# Altium PCB PCB2.PcbDoc
Units mm, origin at the board's own origin, x right, y up, seen from the top; angles counter-clockwise.
Board outline 83.57 x 47.5 mm, 2 copper layers (Top Layer, Bottom Layer); 9 components, 61 nets, 39 pads, 0 vias.
Unrouted connection lines stored in the file: 17.
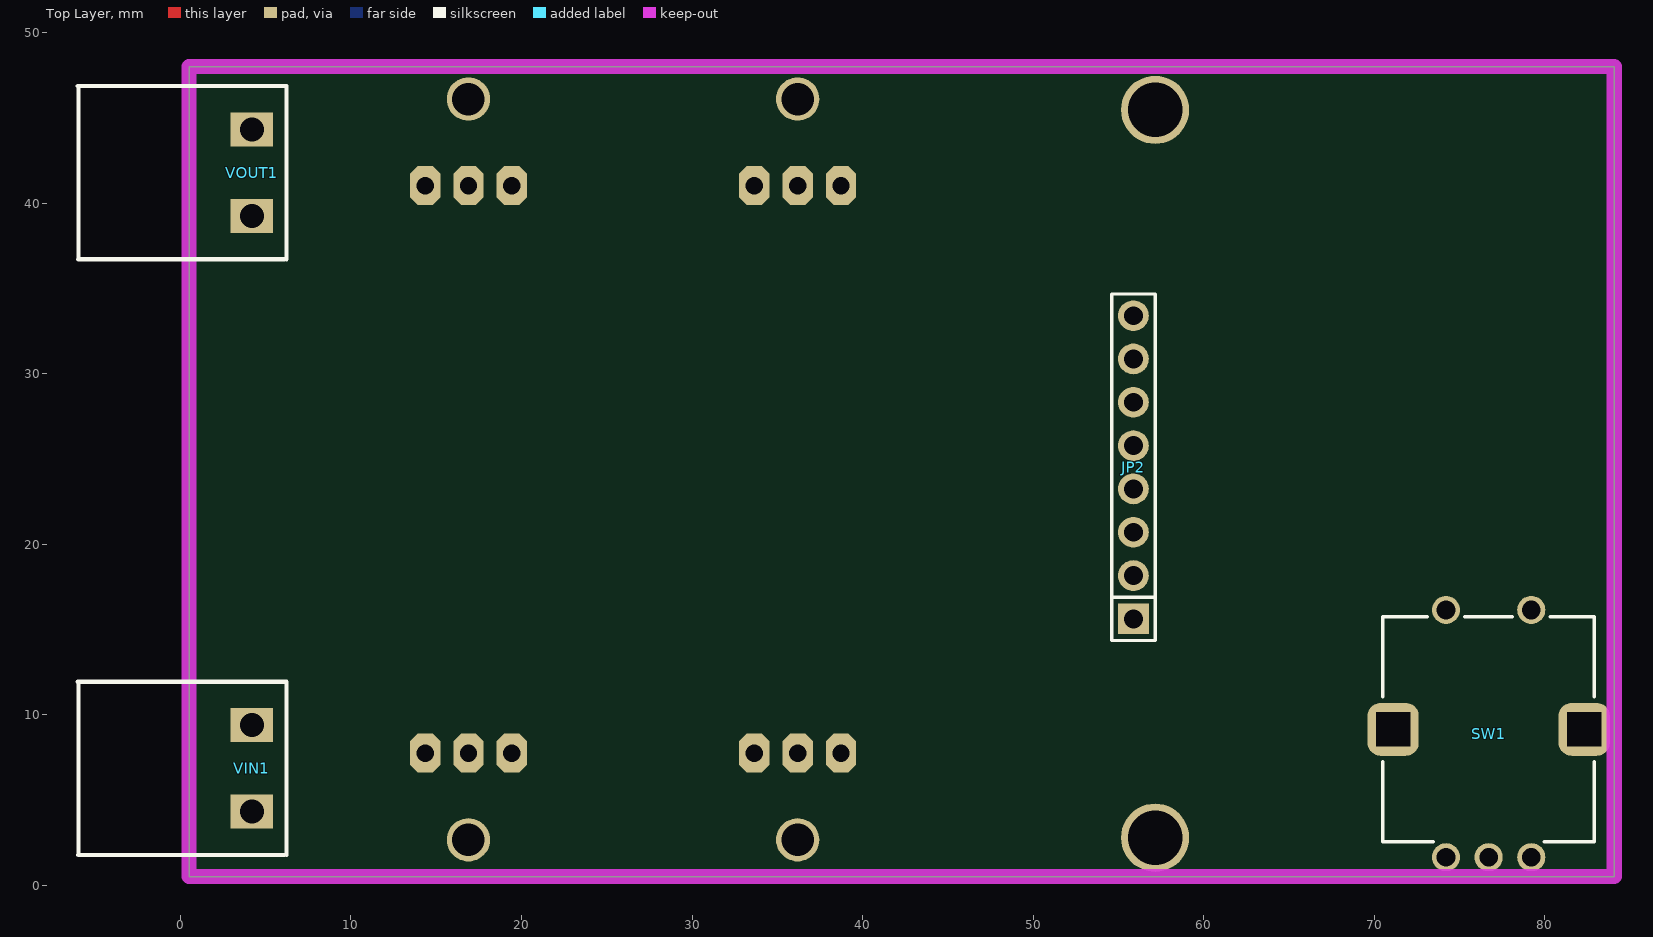
[diagram p0: Top Layer view]
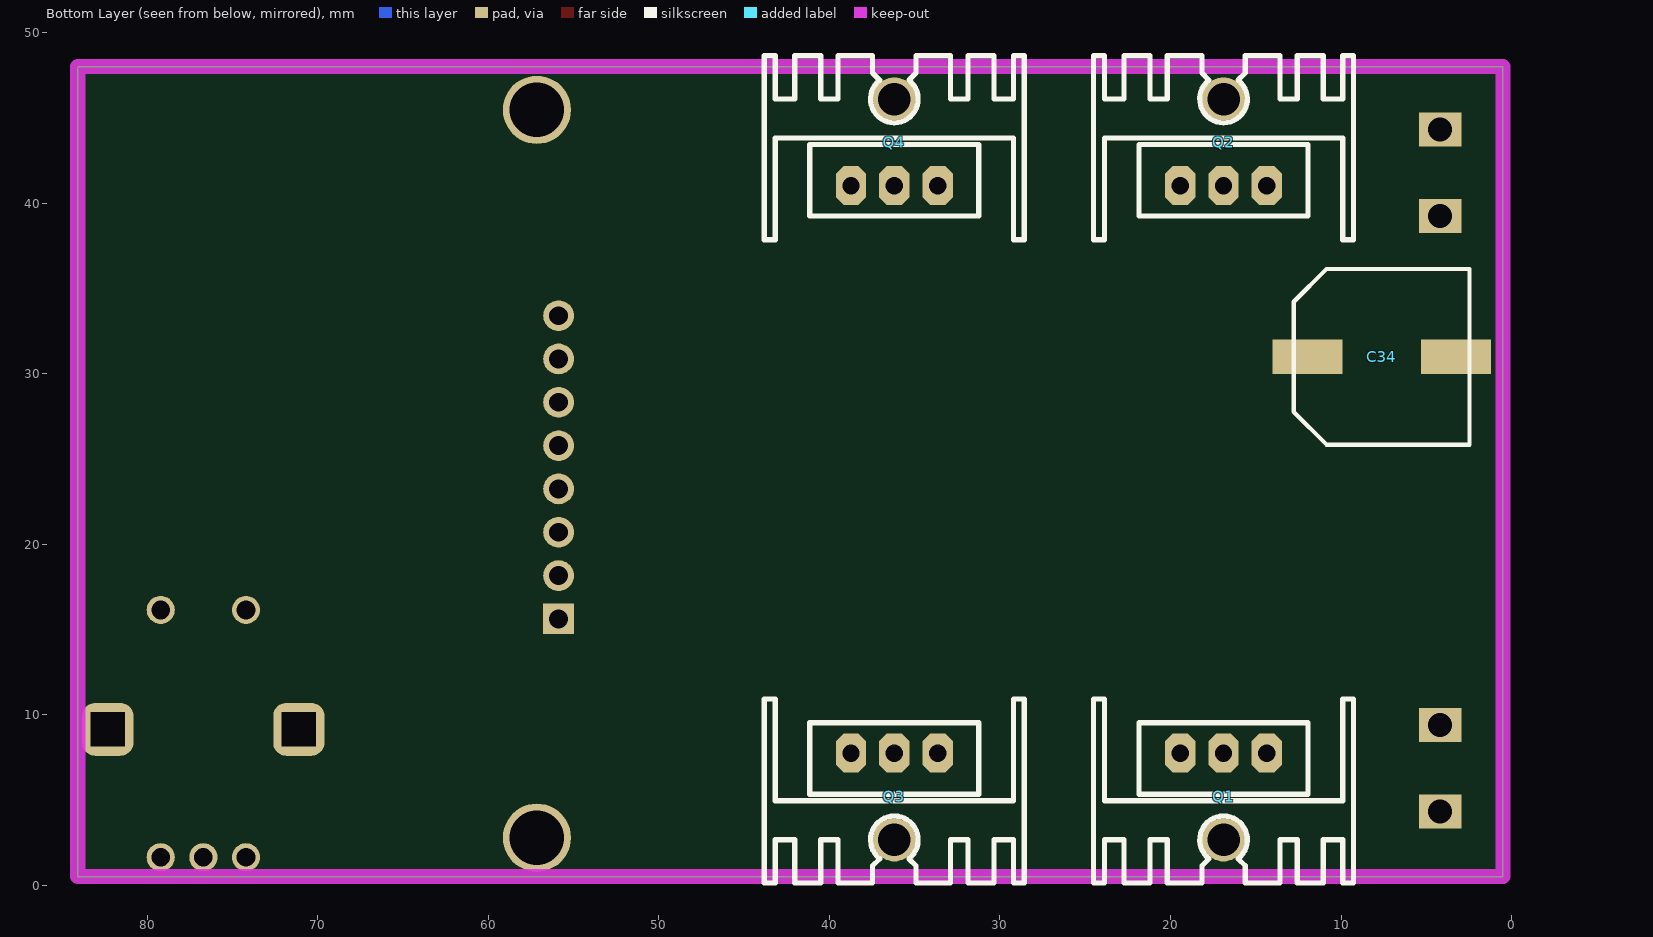
[diagram p1: Bottom Layer view, seen from below]

## Layer stack, top to bottom
Top Solder: solder mask 0.0102, Solder Resist, Dk 3.5
Top Layer: signal copper 0.0356
Dielectric 1: dielectric 0.32, FR-4, Dk 4.8
Bottom Layer: signal copper 0.0356
Bottom Solder: solder mask 0.0102, Solder Resist, Dk 3.5

## Board outline
0.508,0.508 0.508,48.006 84.074,48.006 84.074,0.508

## Design rules (kind name [scope] priority, off if disabled: settings)
Clearance [All] p1: gap=0.203 ignorepadtopadclearanceinfootprint=FALSE
PlaneConnect [All] p1: planeconnectstyle=Direct reliefexpansion=0.508 reliefentries=4 reliefconductorwidth=0.254 reliefairgap=0.254
PolygonConnect [All] p1: connectstyle=Direct reliefconductorwidth=0.254 reliefentries=4 polygonreliefangle="90 Angle" airgapwidth=0.254
RoomDefinition Sheet2 [InComponentClass('Sheet2')] p1: confinementstyle=ConfineIn formatcopy=TRUE lockcomponents=FALSE outline -57.785,-160.655 -6.985,-160.655 -6.985,-135.255 -57.785,-135.255
RoutingVias [All] p1: holewidth=0.4 width=0.8 viastyle="Through Hole" minholewidth=0.4 minwidth=0.8 maxholewidth=0.4 maxwidth=0.8
SolderMaskExpansion [All] p1: expansion=0.102 istentingtop=FALSE
Width [All] p1: maxlimit=1.524 minlimit=0.229 preferedwidth=0.635
29 further rules are at their usual default settings.

## Components (designator, comment, footprint, x,y, rotation, side; value= is the part's Value field where it differs from the comment)
C34 "1000uF" "tu nhom 10 (G)" 7.62,30.988 r180 bottom
JP2 "lcd_1.8 inch" "JP 1x8 DT" 55.88,15.621 r90 top
Q1 "IRFZ44" QTO-220H3 14.351,7.747 r0 bottom locked
Q2 "IRFZ44" QTO-220H3 19.431,41.021 r180 bottom
Q3 "IRFZ44" QTO-220H3 33.655,7.747 r0 bottom locked
Q4 "IRFZ44" QTO-220H3 38.735,41.021 r180 bottom
SW1 "482024764004" 482024764004 76.708,9.144 r270 top locked
VIN1 "CON 2 EDG5.08" "CON 2 2EDG5.08" 4.191,4.318 r90 top
VOUT1 "CON 2 EDG5.08" "CON 2 2EDG5.08" 4.191,39.243 r90 top

## Footprints (in the part's own frame and the unit in brackets; to place one, negate y for a bottom-side part, rotate by r counter-clockwise, add the part's x,y. Pads: shape width x height; smd on the part's side, far side on the other; paste and mask are expansions set on the pad)
482024764004 [mm]
  round 1.65 hole 1.1: 1(-7,-2.5) 2(-7,2.5) A(7.5,-2.5) B(7.5,2.5) C(7.5,0)
  rrect50% 3.1x3 hole 2 square: S1(0,5.6) S2(0,-5.6)
  silkscreen extent -6.6,-6.2 6.6,6.2, body extent -7.32,-6.81 7.8,6.81, height 20.1
"CON 2 2EDG5.08" [mm]
  rect 2x2.5 hole 1.4: 1(0,0) 2(5.08,0)
  silkscreen extent -2.54,-2.03 7.62,10.21, body extent -2.5,-1.75 7.58,10.25, height 3.15
"JP 1x8 DT" [mm] "8 pins, 1 row, straight, gold plating"
  rect 1.8x1.8 hole 1.1: 1(0,0)
  round 1.8 hole 1.1: 2(2.54,0) 3(5.08,0) 4(7.62,0) 5(10.16,0) 6(12.7,0) 7(15.24,0) 8(17.78,0)
  silkscreen extent -1.27,-1.27 19.05,1.27, body extent -1.27,-1.27 19.05,1.27, height 8.54
QTO-220H3 [mil] "TO-220 1-2-3"
  oct 70x90 hole 40: 1(0,0) 2(100,0) 3(200,0)
  round 100 hole 75: 2(100,200)
  silkscreen extent -200,-125 400,300, body extent -190,-102 392,323, height 984
"tu nhom 10 (G)" [mm]
  rect 4.1x2 smd: 1(-4.35,0) 2(4.35,0)
  silkscreen extent -5.15,-5.15 5.15,5.15, body extent -5.9,-5.25 5.9,5.25, height 10.5

## Part data
C34: library part "Tu Nhom 1000uF 10V", "Dán", Chung_Loai=Dán, Don_Vi=Con, Ma_Hang=MH007515, So_Chan=2, Ten_Linh_Kien="Tụ Nhôm 1000uF 10V"
JP2: library part "JP 1x8 2.54 Duc Thang", "Cắm", Chung_Loai=Cắm, Don_Vi=Con, Ma_Hang=MH000903, Ten_Linh_Kien="Jump Đơn Đực 2.54MM 1x40P Thẳng 11MM"
Q1 Q2 Q3 Q4: "HEXFET N-Channel Power MOSFET"
SW1: "WS-ENTV Mechanical Incremental Encoder Switch, Plastic Shaft without bushing, 24Pulse/360°, 24positi", Insulation Resistance=100MΩ, Manufacturer="Wurth Elektronik", Operating Temperature Max=85°C, Operating Temperature Min=-40°C, Rated Current=10mA, Category="Encoder Switches", ComponentLink1Description="Website Link", ComponentLink1URL=https://www.we-online.com/redexpert/article/482024764004?ad, ComponentLink2Description="Datasheet Link", ComponentLink2URL=https://www.we-online.com/redexpert/spec/482024764004?ad, Detent=24positions, Electrical Life Encoder=30000Cycles, Electrical Life Switch=20000Cycles, Height=20mm, Length=13.2mm, Manufacturer Part Number=482024764004, Match Code=WS-ENTV, Mount="Through Hole", Operation Force=300g, Packaging=Tray, Resolution=24Pulse/360°, Width=12.4mm
VIN1 VOUT1: "Cắm", Chung_Loai=Cắm, Don_Vi=Con, Ma_Hang=MH000759, Ten_Linh_Kien="CON 2 2EDG5.08-2P 5.08MM ( Xanh Cong)"

## Free pads (board coordinates)
  round 4 hole 3.2: 5(57.15,2.794) 5(57.15,45.466)

## Nets (pads, with @x,y where several pads share a name; then routed paths per layer and width w, separated by ;. In a path a pad name is that pad's centre, name@x,y a point inside that pad or via, vN(x,y) a via of type N, cw(c..) or ccw(c..) an arc to the next point about the centre after c; other vN are vias at no path point)
3v3: JP2.1 JP2.8
+12: 
A0: JP2.5
buzzer: 
CLK: 
CS: JP2.3
current_sense: 
enc_a: SW1.A
enc_b: SW1.B
enc_c: SW1.1
fan: 
GND: JP2.2 pad.5 SW1.2 SW1.C
HS1: Q1.1
HS2: Q2.1
IO: 
LS1: Q3.1
LS2: Q4.1
MISO: 
MOSI: JP2.6
NetC2_1: 
NetC17_1: 
NetC22_2: 
NetC24_1: 
NetC24_2: 
NetC31_2: 
NetC32_2: 
NetC35_2: 
NetD1_2: 
NetD3_2: 
NetD4_2: 
NetD6_2: 
NetH1_2: 
NetL3_1: 
NetLS1_2: 
NetNT1_1: VOUT1.2
NetQ5_1: 
NetQ6_1: 
NetR2_1: 
NetR7_1: 
NetR11_1: 
NetR13_1: 
NetR22_1: 
NetR25_1: 
NetR28_2: 
PGND: C34.2 Q3.3 Q4.3 VIN1.1
RESET: 
RST: JP2.4
SCK: JP2.7
SO1_N: 
SO1_P: 
temp: 
TIM1_CH1: 
TIM1_CH1N: 
TIM1_CH2: 
TIM1_CH2N: 
V_IN: Q1.2 VIN1.2
V_OUT: C34.1 Q2.2 VOUT1.1
vin_sense: 
vout_sense: 
VS1: Q1.3 Q3.2
VS2: Q2.3 Q4.2
pads on no net: SW1.S1 SW1.S2

## Keep-outs
Keep-Out Layer:
  the board outline again, w0.889